# Altium PCB IPM_VFD.PcbDoc
Units mm, origin at the board's own origin, x right, y up, seen from the top; angles counter-clockwise.
Board outline 115.19 x 72.52 mm, 2 copper layers (Top Layer, Bottom Layer); 53 components, 36 nets, 195 pads, 32 vias.
Unrouted connection lines stored in the file: 22.
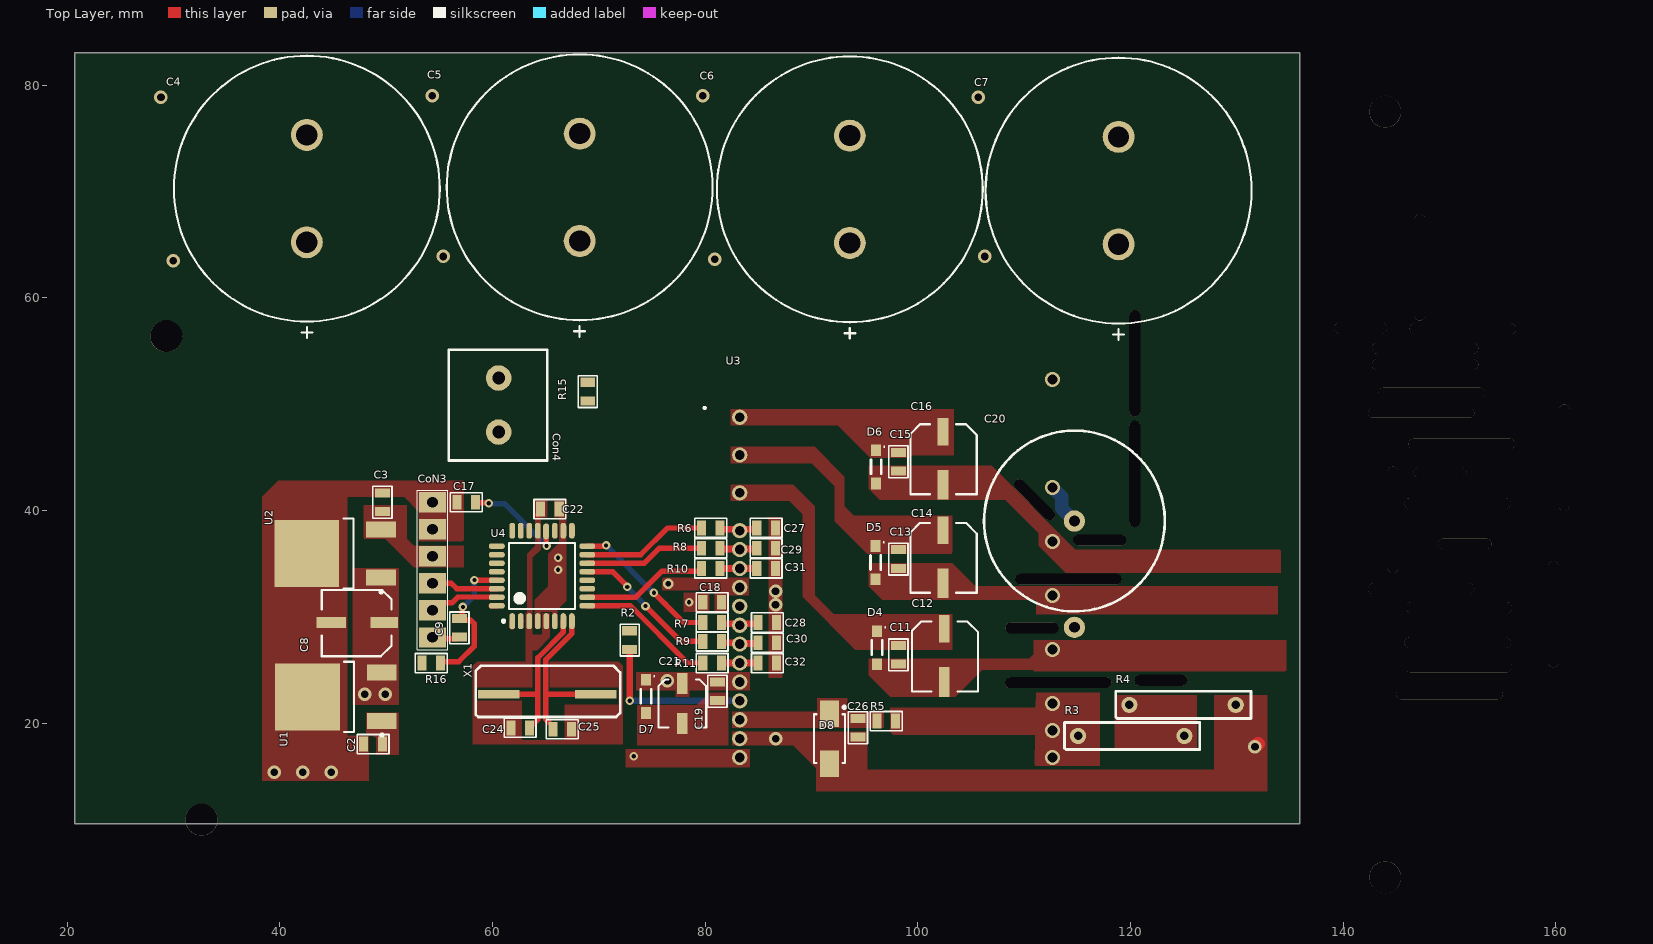
[diagram p0: Top Layer view]
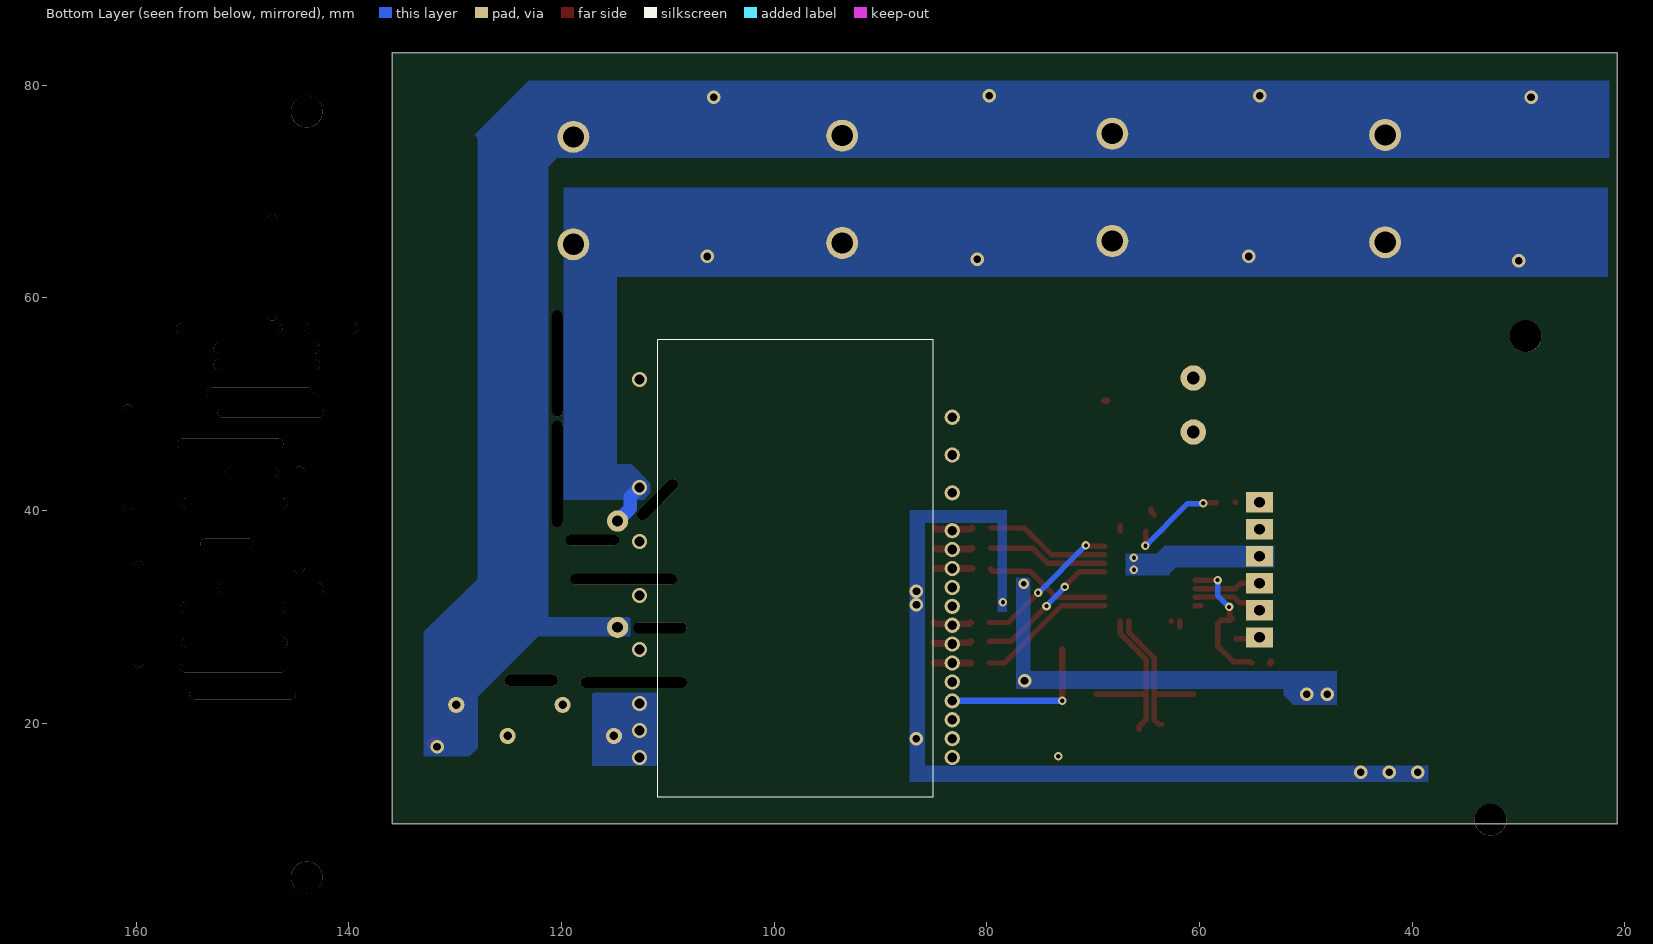
[diagram p1: Bottom Layer view, seen from below]

## Layer stack, top to bottom
Top Solder: solder mask 0.0102, Solder Resist, Dk 3.5
Top Layer: signal copper 0.0356
Dielectric 1: dielectric 0.32, FR-4, Dk 4.8
Bottom Layer: signal copper 0.0356
Bottom Solder: solder mask 0.0102, Solder Resist, Dk 3.5

## Board outline
20.701,10.541 135.89,10.541 135.89,83.058 20.701,83.058

## Design rules (kind name [scope] priority, off if disabled: settings)
Clearance [All] p1: gap=0.1 ignorepadtopadclearanceinfootprint=FALSE
ComponentClearance [All] p1: gap=0 collisioncheckmode=3 verticalgap=0 showdistances=FALSE
Height [All] p1: minheight=0 maxheight=2539.975 prefheight=12.7
PlaneConnect [All] p1: planeconnectstyle=Direct reliefexpansion=0.508 reliefentries=4 reliefconductorwidth=0.254 reliefairgap=0.254
PolygonConnect [All] p1: connectstyle=Direct reliefconductorwidth=0.254 reliefentries=4 polygonreliefangle="90 Angle" airgapwidth=0.254
RoutingVias [All] p1: holewidth=0.711 width=1.27 viastyle="Through Hole" minholewidth=0.711 minwidth=1.27 maxholewidth=0.711 maxwidth=1.27
SolderMaskExpansion [All] p1: expansion=0.102 istentingtop=FALSE
Width [All] p1: maxlimit=2539.975 minlimit=0.254 preferedwidth=0.254 minimp=50.000000 maximp=50.000000 favimp=50.000000
27 further rules are at their usual default settings.

## Components (designator, comment, footprint, x,y, rotation, side; value= is the part's Value field where it differs from the comment)
C2 "100nF 0805" C-0805R 48.768,18.034 r0 top
C3 "100nF 0805" C-0805R 49.657,40.767 r270 top
C4 "400v 220uF" "400 220Uf" 42.545,75.311 r270 top
C5 "400v 220uF" "400 220Uf" 68.199,75.438 r270 top
C6 "400v 220uF" "400 220Uf" 93.599,75.251 r270 top
C7 "400v 220uF" "400 220Uf" 118.872,75.124 r270 top
C8 "50v 22uF" "50v 22uf" 47.117,29.464 r180 top
C9 "100nF 0805" C-0805R 56.896,28.956 r270 top
C11 "1nF 0805" C-0805R 98.171,26.416 r90 top
C12 "50v 22uF" "50v 22uf" 102.489,26.162 r270 top
C13 "1nF 0805" C-0805R 98.171,35.433 r90 top
C14 "50v 22uF" "50v 22uf" 102.362,35.433 r270 top
C15 "1nF 0805" C-0805R 98.171,44.577 r90 top
C16 "50v 22uF" "50v 22uf" 102.362,44.704 r270 top
C17 "100nF 0805" C-0805R 57.531,40.767 r180 top
C18 "100nF 0805" C-0805R 80.645,31.369 r180 top
C19 "100nF 0805" C-0805R 81.153,22.987 r270 top
C20 "snubber" snubber 114.721,39.008 r270 top
C21 "4.7uf 50v" "4x5.3 cap" 77.851,21.844 r270 top
C22 "100nF 0805" C-0805R 65.405,40.132 r180 top
C24 "22pF 0805" C-0805R 62.597,19.558 r180 top
C25 "22pF 0805" C-0805R 66.548,19.431 r0 top
C26 "1uF 0805" C-0805R 94.361,19.558 r270 top
C27 "100nF 0805" C-0805R 85.725,38.354 r0 top
C28 "100nF 0805" C-0805R 85.852,29.464 r0 top
C29 "100nF 0805" C-0805R 85.725,36.449 r180 top
C30 "100nF 0805" C-0805R 85.852,27.559 r180 top
C31 "100nF 0805" C-0805R 85.725,34.544 r180 top
C32 "100nF 0805" C-0805R 85.852,25.654 r180 top
CoN3 "5pinCon_" 5pinCon 54.356,28.067 r0 top
Con4 "2pin" Contactor 60.579,52.451 r270 top
D4 "MMSZ22V-HT" SOD123 96.089,28.59 r270 top
D5 "MMSZ22V-HT" SOD123 95.962,36.591 r270 top
D6 "MMSZ22V-HT" SOD123 96.012,45.593 r270 top
D7 "MMSZ22V-HT" SOD123 74.372,24.018 r270 top
D8 "M7_R2_00001" DO-214AC 91.694,18.542 r270 top
R2 "10K" R-0805R 72.898,27.813 r90 top
R3 "shunt" shunt 115.062,18.796 r0 top
R4 "shunt" shunt 119.888,21.717 r0 top
R5 "22K" R-0805R 97.028,20.193 r0 top
R6 "R" R-0805R 80.518,38.354 r0 top
R7 "R" R-0805R 80.645,29.464 r0 top
R8 "R" R-0805R 80.518,36.449 r0 top
R9 "R" R-0805R 80.645,27.686 r0 top
R10 "R" R-0805R 80.518,34.544 r0 top
R11 "R" R-0805R 80.645,25.654 r0 top
R15 "10K" R-0805R 68.961,51.181 r90 top
R16 "10K" R-0805R 54.229,25.654 r0 top
U1 "L78M15CDT" TO-252 45.593,22.479 r180 top
U2 "L78M05CDT" TO-252 45.53,35.952 r180 top
U3 "IGBT" 6MBP20XSF06050P 83.249,48.768 r90 top
U4 "ATMEGA328P-AU" TQFP80P900X900X120-32N 64.662,33.841 r90 top
X1 "Crystal" crystal 60.579,22.733 r0 top

## Footprints (in the part's own frame and the unit in brackets; to place one, negate y for a bottom-side part, rotate by r counter-clockwise, add the part's x,y. Pads: shape width x height; smd on the part's side, far side on the other; paste and mask are expansions set on the pad)
"4x5.3 cap" [mm]
  rect 2x1 smd: 1(-1.875,0) 2(1.875,0)
  silkscreen extent -2.25,-2.25 2.25,2.25, body extent -2.63,-2.15 2.67,2.15, height 5.71
5pinCon [mm]
  rect 2.5x1.9 hole 1: 1(0,0) 2(0,2.54) 3(0,5.08) 4(0,7.62) 5(0,10.16) 6(0,12.7)
  silkscreen extent -1.44,-1.14 1.42,13.84
6MBP20XSF06050P [mm]
  round 1.431 hole 0.92: 3(0,0) 5(-3.556,0) 7(-7.112,0) 9(-10.668,0) 10(-12.446,0) 11(-14.224,0) 12(-16.002,0) 13(-17.78,0) 14(-19.558,0) 15(-21.336,0) 16(-23.114,0) 17(-24.892,0) 18(-26.67,0) 19(-28.448,0) 20(-30.226,0) 21(-32.004,0) 22(-32.004,-29.4) 23(-29.464,-29.4) 24(-26.924,-29.4) 26(-21.844,-29.4) 28(-16.764,-29.4) 30(-11.684,-29.4) 32(-6.604,-29.4) 36(3.556,-29.4)
  silkscreen extent 0.78,3.2 0.98,3.4
"50v 22uf" [mm] "Aluminum Electrolytic Capacitor, Body 6.70x6.70x6.30mm, IPC Low Density"
  rect 2.6x1 smd: 1(-2.7,0)
  rect 2.8x1 smd: 2(2.286,0)
  silkscreen extent -3.4,-3.05 3.18,3.18, body extent -3.63,-3.17 3.37,3.43, height 6.92
"400 220Uf" [mm]
  round 3 hole 2: 1(0,0) 2(10.1,0)
  silkscreen extent -7.45,-12.5 19.1,12.5, body extent -6.05,-11.18 15.95,10.82, height 49.77
C-0805R [mm] "capacitor 0805 reflow soldering"
  rect 0.85x1.4 smd: 1(-0.875,0) 2(0.875,0)
  silkscreen extent -1.5,-0.9 1.5,0.9, body extent -1,-0.63 1,0.63, height 0.78
Contactor [mm]
  round 2.4 hole 1.2: 1(0,0) 2(5.08,0)
  silkscreen extent -2.67,-4.7 7.75,4.57, body extent -2.54,-4.57 7.62,4.43, height 15.21
crystal [mm]
  rect 3.9x0.8 smd: 1(0,0) 2(9.153,0)
  silkscreen extent -2.16,-2.16 11.43,2.67, body extent -1.67,-2.27 10.83,2.53, height 4.01
DO-214AC [mm]
  rect 2.5x1.8 smd: a(2.35,0) k(-2.35,0)
  silkscreen extent -3.07,-1.45 2.3,1.51, body extent -2.77,-1.42 2.72,1.37, height 2.3
R-0805R [mm] "resistor 0805 reflow soldering"
  rect 0.85x1.4 smd: 1(-0.875,0) 2(0.875,0)
  silkscreen extent -1.5,-0.9 1.5,0.9, body extent -1,-0.62 1,0.63, height 0.5
shunt [mil]
  round 60 hole 31.5: 1(0,0) 2(393.7,0)
  silkscreen extent -50,-50 450,50
snubber [mm]
  round 2 hole 1: 1(0,0) 2(10,0)
  silkscreen extent -8.5,-8.5 8.5,8.5, body extent -3.05,-3.05 5.49,3.05, height 18.24
SOD123 [mm]
  rect 1.1x0.95 smd: a(3.063,0.05) k(-0.062,0.05)
  silkscreen extent -0.46,-0.43 2.15,0.87, body extent -0.38,-0.78 3.32,0.83, height 1.28
TO-252 [mm]
  rect 2.8x1.5 smd: 1(-4,2.275) 2(-4,-2.275)
  rect 6.1x6.3 smd: 3(3,0)
  silkscreen extent -4.13,-3.3 -0.45,3.72, body extent -4.52,-3.37 5.58,3.37, height 2.41
TQFP80P900X900X120-32N [mm] "TQFP, 32-Leads, Body 7.00x7.00mm, Pitch 0.80mm, IPC Medium Density"
  oval 1.5x0.55 smd: 1(-4.25,2.8) 2(-4.25,2) 3(-4.25,1.2) 4(-4.25,0.4) 5(-4.25,-0.4) 6(-4.25,-1.2) 7(-4.25,-2) 8(-4.25,-2.8) 17(4.25,-2.8) 18(4.25,-2) 19(4.25,-1.2) 20(4.191,-0.381) 21(4.25,0.4) 22(4.25,1.2) 23(4.25,2) 24(4.25,2.8)
  oval 0.55x1.5 smd: 9(-2.8,-4.25) 10(-2,-4.25) 11(-1.2,-4.25) 12(-0.4,-4.25) 13(0.4,-4.25) 14(1.2,-4.25) 15(2,-4.25) 16(2.8,-4.25) 25(2.8,4.25) 26(2,4.25) 27(1.2,4.25) 28(0.4,4.25) 29(-0.4,4.25) 30(-1.2,4.25) 31(-2,4.25) 32(-2.8,4.25)
  silkscreen extent -4.37,-3.1 3.1,3.75, body extent -4.44,-4.5 4.55,4.5, height 1.6

## Part data
C2 C3 C9 C11 C13 C15 C17 C18 C19 C20 C22 C24 C25 C26 C27 C28 C29 C30 C31 C32: Case/Package=Radial, Manufacturer=Nichicon, Manufacturer Part Number=LKS1J472MESZ, Max Operating Temperature=85°C, Min Operating Temperature=-40°C, Package Quantity=250, Ripple Current=3A, Supplier Part Number 1=647-LKS1J472MESZ, Tolerance=20%, Voltage Rating=63V, Diameter=22mm, Height - Seated (Max)=1.772inch, Lead Pitch=0.394inch, Length=45mm, Life (Hours)=1000Hour, Mount="Through Hole", Packaging=Bulk, RoHS=Yes, Supplier 1=Mouser, Termination="Snap in", Voltage Rating (DC)=63V
  C2 C3 C9 C17 C18 C19 C22 C27 C28 C29 C30 C31 C32: ComponentLink2Description=Link, ComponentLink2URL=https://ozdisan.com/Product/Detail/342152/CL21F104ZBANNNC
  C11 C13 C15: ComponentLink1Description=Link, ComponentLink1URL=https://ozdisan.com/passive-components/capacitors/smt-smd-and-mlcc-capacitors/CL21B102KBANNNC
  C24 C25: ComponentLink1Description=Link, ComponentLink1URL=https://ozdisan.com/passive-components/capacitors/smt-smd-and-mlcc-capacitors/CL21C220JCANNNC
C4 C5 C6 C7 C8 C12 C14 C16: Capacitance=4.7mF, Case/Package=Radial, Manufacturer=Nichicon, Manufacturer Part Number=LKS1J472MESZ, Max Operating Temperature=85°C, Min Operating Temperature=-40°C, Package Quantity=250, Ripple Current=3A, Supplier Part Number 1=647-LKS1J472MESZ, Tolerance=20%, Voltage Rating=63V, Diameter=22mm, Height - Seated (Max)=1.772inch, Lead Pitch=0.394inch, Length=45mm, Life (Hours)=1000Hour, Mount="Through Hole", Packaging=Bulk, RoHS=Yes, Supplier 1=Mouser, Termination="Snap in", Voltage Rating (DC)=63V
  C4 C5 C6 C7: ComponentLink2Description=https://www.ozdisan.com/pasif-komponentler/kondansatorler/aluminyum-kondansatorler/PKL5-063V472MM450, ComponentLink2URL=https://www.ozdisan.com/pasif-komponentler/kondansatorler/aluminyum-kondansatorler/PKL5-063V472MM450
  C8 C12 C14 C16: ComponentLink3Description=Link, ComponentLink3URL=https://ozdisan.com/passive-components/capacitors/aluminum-capacitors/MRW-050V220ME057-TR
R2 R15 R16: library part "10K 0805"
R3 R4: "Res1206"
R5: library part "22K 0805"
R6 R7 R8 R9 R10 R11: library part "R 0805"
U1: Case/Package=DPAK, Dropout Voltage=2V, Manufacturer=STMicroelectronics, Max Operating Temperature=150°C, Max Output Current=500mA, Max Input Voltage=35V, Min Operating Temperature=0°C, Output Voltage=15V, Package Quantity=75, Quiescent Current=6mA, ComponentLink1Description=link, ComponentLink1URL=https://karakoyelektronik.com/regulator/ua78m15-21734, Height=2.4mm, Length=6.6mm, Manufacturer Part Number=L78M15CDT, Min Input Voltage=35V, Mount="Surface Mount", Number of Outputs=1, Number of Pins=3, Output Current=500mA, Output Type=Fixed, Packaging=Rail/Tube, Polarity=Positive, Radiation Hardening=No, RoHS=Yes, Supplier 1=Avnet, Supplier Part Number 1=L78M15CDT, Width=6.2mm
U2: library part L78M05, Case/Package=DPAK, Dropout Voltage=2V, Manufacturer=STMicroelectronics, Manufacturer Part Number=L78M15CDT, Max Operating Temperature=150°C, Max Output Current=500mA, Max Input Voltage=35V, Min Operating Temperature=0°C, Output Voltage=15V, Package Quantity=75, Quiescent Current=6mA, ComponentLink1Description=Link, ComponentLink1URL=https://ozdisan.com/integrated-circuits-ics/power-management-ics/linear-voltage-regulators/MC7805BDTRKG, Height=2.4mm, Length=6.6mm, Min Input Voltage=35V, Mount="Surface Mount", Number of Outputs=1, Number of Pins=3, Output Current=500mA, Output Type=Fixed, Packaging=Rail/Tube, Polarity=Positive, Radiation Hardening=No, RoHS=Yes, Supplier 1=Avnet, Supplier Part Number 1=L78M15CDT, Width=6.2mm
U3: library part 6mbp20xsf060-50
U4: "Microchip Technology ATMEGA328P-AN, 8bit AVR Microcontroller, 20MHz, 32 kB Flash, 32-Pin TQFP"
X1: "AS49SD-16M-FC160F3-TR"
D4 D5 D6 D7: ComponentLink1Description=Link, ComponentLink1URL=https://ozdisan.com/power-semiconductors/diodes-diode-modules-and-rectifiers/zener-diodes/MMSZ22V-HT
D8: ComponentLink1Description=Link, ComponentLink1URL=https://ozdisan.com/power-semiconductors/diodes-diode-modules-and-rectifiers/general-purpose-diodes/M7R200001

## Free pads (board coordinates)
  round 3 hole 3: 106(29.337,56.388) 106(32.639,10.922) 106(143.952,5.5) 106(143.952,77.5)
  oval 5x1 hole 1 slot 5 at 0 deg unplated mask+0: 110(110.744,28.956) 110(117.094,37.211) 110(122.858,24.032) 110(141.629,57.132) 110(149.098,43.561) 110(151.433,36.859)
  oval 5x1 hole 1 slot 5 at 135 deg unplated rot 135 mask+0: 110(110.975,41.01)
  oval 10x1 hole 1 slot 10 at 0 deg unplated mask+0: 110(113.211,23.806) 110(114.158,33.539) 110(147.32,32.639) 110(147.701,53.721) 110(147.701,55.245) 110(148.336,51.054) 110(149.987,22.733) 110(150.749,27.559) 110(150.749,40.64) 110(150.876,25.273) 110(150.876,30.861) 110(151.15,46.256) 110(151.246,57.087)
  oval 1x10 hole 1 slot 10 at 90 deg unplated mask+0: 110(120.396,43.434) 110(120.396,53.848) 110(144.653,39.116) 110(147.193,62.865) 110(159.766,30.226) 110(160.782,44.958)
  oval 10x0.8 hole 0.8 slot 10 at 0 deg unplated mask+0: 110(147.32,49.149)

## Via types
v1: diameter 1.27, hole 0.711, Top Layer to Bottom Layer, 18 vias
v2: diameter 0.8, hole 0.4, Top Layer to Bottom Layer, 10 vias
v3: diameter 0.8, hole 0.4, Top Layer to Bottom Layer, tented top, 3 vias
v4: diameter 1, hole 0.5, Top Layer to Bottom Layer, 1 vias

## Nets (pads, with @x,y where several pads share a name; then routed paths per layer and width w, separated by ;. In a path a pad name is that pad's centre, name@x,y a point inside that pad or via, vN(x,y) a via of type N, cw(c..) or ccw(c..) an arc to the next point about the centre after c; other vN are vias at no path point)
5v: C3.2 C22.1 CoN3.4 R2.2 R15.1 R16.1 U2.2 U4.4 U4.6 U4.18 | length 1.4
  Top Layer w0.635: R16.1@53.247,25.781 53.354,25.673 R16.1 ; CoN3.4@54.058,35.389 CoN3.4 ; R15.1@68.686,50.306 R15.1
  Bottom Layer w0.635: CoN3.4@53.975,35.306 CoN3.4
  other v3: 66.167,34.417 66.167,35.56
15v: C8.1 C18.1 C19.1 C21.1 D7.k U1.2 U2.1 U3.12 U3.17
  other v1: 48.006,22.733 49.911,22.733 76.454,24.003
  other v4: 76.537,33.107
24V: C2.2 U1.1
Con: Con4.1 R15.2 U4.32 | length 1.1
  Top Layer w0.508: U4.32@59.862,31.033 60.404,31.033 U4.32 ; Con4.1 Con4.1@60.941,52.813
GND: C2.1 C3.1 C4.1 C5.1 C6.1 C7.1 C8.2 C17.2 C18.2 C19.2 C20.2 C21.2 C22.2 C24.2 C25.2 C26.2 C27.2 C28.2 C29.1 C30.1 C31.1 C32.1 CoN3.5 CoN3.6 Con4.2 D7.a D8.a R4.2 U1.3 U2.3 U3.20 U4.3 U4.5 U4.21 | length 1.1
  Top Layer w0.508: C17.2@56.634,40.745 C17.2 ; C22.2@64.262,39.589 64.53,39.857 C22.2
  Top Layer w1.27: v1(131.699,17.78) v1@131.991,18.072
  Bottom Layer w0.508: v2(78.486,31.369) v2@78.486,31.412
  other v1: 39.497,15.367 42.164,15.367 44.831,15.367 86.631,18.523 86.614,31.115 86.614,32.385 28.829,78.867 105.664,78.867 54.356,78.994 79.756,78.994
IN(HU1): C27.1 R6.2 U3.9 | length 3.7
  Top Layer w0.635: R6.2 81.393,38.335 81.5,38.227 83.122,38.227 U3.9 83.376,38.227 84.743,38.227 84.85,38.335 C27.1
IN(HU): R6.1 U4.15 | length 11.8
  Top Layer w0.508: U4.15 73.941,35.841 76.454,38.354 R6.1
IN(HV1): C29.2 R8.2 U3.10 | length 3.6
  Top Layer w0.635: R8.2 81.456,36.386 83.186,36.386 U3.10 83.313,36.386 84.787,36.386 C29.2
IN(HV): R8.1 U4.14 | length 11.3
  Top Layer w0.508: U4.14 74.284,35.041 75.692,36.449 R8.1
IN(HW1): C31.2 R10.2 U3.11 | length 3.5
  Top Layer w0.635: R10.2 U3.11 C31.2
IN(HW): R10.1 U4.10 | length 11.9
  Top Layer w0.508: U4.10 73.497,31.841 75.946,34.29 79.472,34.29 79.643,34.461 R10.1
IN(LU1): C28.1 R7.2 U3.14 | length 3.7
  Top Layer w0.635: R7.2 81.52,29.445 81.627,29.337 83.122,29.337 U3.14 83.376,29.337 84.87,29.337 84.977,29.445 C28.1
IN(LU): R7.1 U4.16 | length 13.9
  Top Layer w0.508: U4.16 70.528,36.641 70.596,36.709 v2(70.675,36.709) ; v2(75.184,32.258) 76.228,31.214 77.978,29.464 R7.1
  Bottom Layer w0.508: v2(70.675,36.709) 70.704,36.709 75.155,32.258 v2(75.184,32.258)
IN(LV1): C30.2 R9.2 U3.15 | length 3.6
  Top Layer w0.635: R9.2 81.52,27.667 81.627,27.559 83.122,27.559 U3.15 83.313,27.495 84.914,27.495 C30.2
IN(LV): R9.1 U4.13 | length 13.8
  Top Layer w0.508: U4.13 71.296,34.241 v2@72.771,32.766 ; v2@74.332,31.078 77.724,27.686 R9.1
  Bottom Layer w0.508: v2(72.678,32.81) 72.678,32.765 74.388,31.054 v2(74.388,31.009)
IN(LW1): C32.2 R11.2 U3.16 | length 3.5
  Top Layer w0.635: R11.2 U3.16 C32.2
IN(LW): R11.1 U4.9 | length 13.1
  Top Layer w0.508: U4.9 72.972,31.041 78.359,25.654 R11.1
LED_TV: CoN3.2 U4.31 | length 6.6
  Top Layer w0.508: CoN3.2 55.052,31.303 56.195,31.303 56.75,31.858 59.89,31.858 59.899,31.849 60.404,31.849 U4.31 U4.31@60.42,31.849
NetC9_1: C9.1 R16.2 U4.29 | length 13.9
  Top Layer w0.508: R16.2 55.231,25.781 56.827,25.781 58.293,27.247 58.293,29.337 57.97,29.66 57.067,29.66 C9.1 ; C9.1@57.001,29.838 57.165,30.002 57.165,30.876 v2(57.221,30.932) ; v2(58.305,33.45) 58.31,33.445 60.408,33.445 U4.29
  Bottom Layer w0.508: v2@57.165,30.876 v2(57.221,30.932) 58.299,32.01 58.299,33.444 v2(58.305,33.45)
NetC11_2: C11.2 C12.1 D4.k U3.7
NetC13_2: C13.2 C14.1 D5.k U3.5
NetC15_2: C15.2 C16.1 D6.k U3.3
NetC17_1: C17.1 U4.20 | length 9.6
  Top Layer w0.508: C17.1 58.452,40.721 59.614,40.721 v2(59.66,40.675) ; U4.20 65.051,38.024 65.051,36.7 v3(65.08,36.67)
  Bottom Layer w0.508: v2@59.795,40.64 61.111,40.64 v3(65.08,36.67)
NetC26_1: C26.1 D8.k R5.1 U3.19
NetR3_1: R3.1 R5.2 U3.22 U3.23 U3.24 | length 0.1
  Bottom Layer w1.27: U3.22 U3.22@112.68,16.733 ; R3.1 R3.1@115.131,18.796
NetR3_2: R3.2 R4.1
RS: C9.2 CoN3.1 | length 2.2
  Top Layer w0.508: CoN3.1 54.483,27.94 C9.2@56.529,27.94
RX: CoN3.3 U4.30 | length 6.3
  Top Layer w0.508: CoN3.3 56.134,33.147 56.64,32.641 U4.30 U4.30@60.42,32.649
TEMP: U3.21 U4.1 | length 0.5
  Top Layer w0.508: U4.1@61.841,29.075 61.841,29.084 61.862,29.105 U4.1
  other v2: 73.279,16.891
U: C15.1 C16.2 D6.a U3.30
V: C13.1 C14.2 D5.a U3.28
VDC: C4.2 C5.2 C6.2 C7.2 C20.1 U3.32 | length 4
  Bottom Layer w1.27: U3.32 113.538,41.275 113.538,40.191 C20.1
  other v1: 29.972,63.5 80.899,63.627 55.372,63.881 106.299,63.881
VFO: R2.1 U3.18 | length 15.2
  Top Layer w0.635: v2(72.898,22.098) R2.1
  Bottom Layer w0.635: v2(72.898,22.098) U3.18
W: C11.1 C12.2 D4.a U3.26
XTAL1: C24.1 U4.7 X1.1 | length 14.9
  Top Layer w0.508: X1.1@60.531,22.733 64.211,22.733 ; C24.1@63.53,19.877 63.805,19.877 64.262,20.334 64.262,22.733 64.262,26.151 66.662,28.551 U4.7
XTAL2: C25.1 U4.8 X1.2 | length 16.1
  Top Layer w0.508: C25.1 65.673,19.706 65.024,20.355 65.024,22.733 ; U4.8 67.462,28.425 65.024,25.987 65.024,22.733 ; X1.2 65.024,22.733
pads on no net: U3.13 U3.36 U4.2 U4.11 U4.12 U4.17 U4.19 U4.22 U4.23 U4.24 U4.25 U4.26 U4.27 U4.28
copper on no net: | length 0.5
  Top Layer w0.508: 62.662,29.591 62.664,29.593 ; 63.462,38.091 63.463,38.092 ; 67.462,38.091 67.462,38.566

## Polygon pours and split planes (outlines as drawn)
5v on Top Layer "5V_L01_P098" (solid, pour order 98): 47.879,40.513 51.943,40.513 51.943,37.338 52.578,36.703 57.277,36.703 57.277,34.671 52.578,34.671 49.91,37.339 47.875,37.339
TEMP on Top Layer "TEMP_L01_P069" (solid, pour order 69): 84.201,17.526 72.517,17.526 72.517,15.875 84.201,15.875
GND on Top Layer "GND_L01_P058" (solid, pour order 58): 38.354,41.275 39.878,42.799 57.277,42.799 57.277,37.211 57.15,37.084 53.086,37.084 53.086,39.878 51.689,41.275 46.355,41.275 46.355,18.796 48.387,18.796 48.387,14.605 38.354,14.605
24V on Top Layer "24V_L01_P060" (solid, pour order 60): 51.181,20.955 48.133,20.955 48.133,19.05 49.058,18.633 49.058,17.018 51.181,17.018
15v on Top Layer "15V_L01_P061" (solid, pour order 61): 46.863,21.717 46.863,34.544 51.181,34.544 51.181,21.717
5v on Top Layer "5V_L01_P096" (solid, pour order 96): 66.929,31.496 66.109,30.676 66.109,30.353 66.115,29.083 65.605,29.083 65.605,30.482 64.516,30.482 64.516,29.053 63.982,29.053 63.978,31.623 65.248,32.893 65.248,35.911 66.294,36.957 66.294,39.37 65.786,39.37 65.786,40.894 66.929,40.894
GND on Top Layer "GND_L01_P083" (solid, pour order 83): 71.882,25.781 72.263,25.4 72.263,18.034 58.166,18.034 58.166,21.336 58.166,25.4 58.547,25.781 63.119,25.781 63.119,30.353 63.246,30.48 63.246,35.941 64.008,36.703 64.008,41.021 65.042,41.021 65.151,40.912 65.151,39.37 64.77,39.37 64.516,39.116 64.516,36.322 63.754,35.56 63.754,28.321 64.699,28.321 64.699,30.353 65.405,30.353 65.405,28.067 64.198,26.86 63.754,26.86 63.754,23.368 58.527,23.368 58.527,22.098 62.738,22.098 62.738,18.415 66.802,18.415 66.802,21.717 71.882,21.717 71.882,23.368 65.405,23.368 65.405,25.781
15v on Top Layer "15V_L01_P094" (solid, pour order 94): 80.899,32.512 80.898,32.511 80.898,30.52 82.002,30.52 82.042,30.48 82.042,32.004 84.074,32.004 84.074,33.655 76.07,33.655 75.946,33.528 75.946,32.512
GND on Top Layer "GND_L01_P093" (solid, pour order 93): 77.978,32.258 80.391,32.258 80.391,30.48 77.978,30.48
GND on Top Layer "GND_L01_P063" (solid, pour order 63): 82.55,19.177 82.55,17.907 88.265,17.907 90.424,15.748 90.424,13.589 132.842,13.589 132.842,22.606 127.889,22.606 127.889,15.621 95.25,15.621 95.25,19.177
V on Top Layer "V_L01_P002" (solid, pour order 2): 111.633,31.623 112.522,30.734 115.062,30.734 115.062,32.893 105.41,32.893 103.251,35.052 95.377,35.052 95.377,32.893 96.647,31.623
U on Top Layer "U_L01_P001" (solid, pour order 1): 95.377,42.037 96.393,41.021 108.204,41.021 111.379,37.846 111.379,36.702 113.92,34.163 134.112,34.163 134.112,36.322 114.808,36.322 106.934,44.196 95.377,44.196
NetC13_2 on Top Layer "NETC13_2_L01_P004" (solid, pour order 4): 93.091,40.513 93.091,40.386 93.98,39.497 103.251,39.497 103.251,36.068 103.124,35.941 95.25,35.941 92.202,38.989 92.202,42.291 90.043,44.45 82.423,44.45 82.423,45.974 90.297,45.974 93.091,43.18
GND on Top Layer "GND_L01_P087" (solid, pour order 87): 73.62,21.097 73.62,21.643 73.64,21.664 79.22,21.664 80.417,22.86 82.169,22.86 82.169,17.907 73.62,17.907
NetC11_2 on Top Layer "NETC11_2_L01_P005" (solid, pour order 5): 87.884,40.894 89.154,39.624 89.154,31.877 94.107,26.924 103.251,26.924 103.251,30.226 92.075,30.226 90.297,32.004 90.297,40.386 88.265,42.418 82.423,42.418 82.423,40.894
15v on Top Layer "15V_L01_P039" (solid, pour order 39): 77.216,23.114 77.216,22.479 78.486,22.479 78.486,23.114 79.121,23.114 84.201,23.114 84.201,24.765 73.533,24.765 73.533,23.114
NetC15_2 on Top Layer "NETC15_2_L01_P003" (solid, pour order 3): 82.423,49.53 103.378,49.53 103.378,45.212 99.441,45.212 99.06,44.831 98.933,44.958 95.504,44.958 92.456,48.006 82.423,48.006
W on Top Layer "W_L01_P006" (solid, pour order 6): 95.377,24.511 97.409,22.479 103.505,22.479 106.045,25.019 112.776,25.019 113.665,25.908 113.665,27.813 112.268,27.813 110.49,26.035 95.377,26.035
NetR3_1 on Top Layer "NETR3_1_L01_P007" (solid, pour order 7): 111.103,21.59 110.976,21.463 97.409,21.463 97.409,19.177 97.663,18.923 111.058,18.924 111.009,16.002 117.094,16.002 117.094,22.86 111.125,22.86
NetR3_2 on Top Layer "NETR3_2_L01_P008" (solid, pour order 8): 118.491,22.606 126.238,22.606 126.238,17.653 118.491,17.653
NetC26_1 on Top Layer "NETC26_1_L01_P009" (solid, pour order 9): 90.551,21.082 90.551,22.352 93.345,22.352 93.345,21.082 96.647,21.082 96.774,20.955 96.774,19.558 82.55,19.558 82.55,21.082
V on Top Layer "V_L01_P018" (solid, remove dead copper, pour order 18): 133.858,32.893 133.858,30.226 111.125,30.226 111.125,32.893
W on Top Layer "W_L01_P019" (solid, pour order 19): 110.913,27.813 134.62,27.813 134.62,24.892 110.913,24.892
GND on Top Layer "GND_L01_P041" (solid, pour order 41): 85.979,31.877 85.979,30.734 85.979,24.257 87.249,24.257 87.249,39.37 85.852,39.37 85.852,39.243 85.979,39.116
5v on Bottom Layer "5V_L02_P099" (solid, pour order 99): 52.959,36.703 63.246,36.703 64.008,35.941 66.929,35.941 66.929,33.909 62.865,33.909 62.865,34.036 62.23,34.671 52.959,34.671
15v on Bottom Layer "15V_L02_P097" (solid, pour order 97): 52.07,23.241 52.07,22.606 51.181,21.717 47.117,21.717 47.117,24.892 75.946,24.892 77.216,24.892 77.216,23.241
15v on Bottom Layer "15V_L02_P095" (solid, pour order 95): 77.216,33.655 75.946,33.655 75.935,33.644 75.935,24.754 75.796,24.615 75.796,23.315 76.778,23.315 77.216,23.753
GND on Bottom Layer "GND_L02_P051" (solid, pour order 51): 128.143,75.311 127.889,75.057 127.889,33.528 132.969,28.575 132.969,16.891 128.651,16.891 127.889,17.653 127.889,22.479 122.174,28.194 113.538,28.194 113.538,29.845 113.665,29.972 121.217,29.972 121.217,72.331 120.396,73.152 21.463,73.152 21.463,80.391 123.063,80.391
GND on Bottom Layer "GND_L02_P079" (solid, pour order 79): 78.105,38.862 78.105,30.48 78.994,30.48 78.994,38.862 85.852,38.862 85.852,16.891 85.852,16.002 38.481,16.002 38.481,14.478 85.852,14.478 87.249,14.478 87.249,40.005 78.105,40.005
VDC on Bottom Layer "VDC_L02_P052" (solid, pour order 52): 119.761,41.021 112.268,41.021 111.633,41.656 111.633,42.545 113.411,44.323 114.808,44.323 114.808,61.976 21.59,61.976 21.59,70.358 119.761,70.358
NetR3_1 on Bottom Layer "NETR3_1_L02_P020" (solid, pour order 20): 110.998,22.86 116.967,22.86 117.094,22.733 117.094,16.002 111.125,16.002 110.998,16.129

## Silkscreen, mask and mechanical layers (free items; w line width, h text height)
Mechanical 13:
  lines w0.254: 146.939,10.541 146.939,10.541